# Altium PCB Arduino UNO R3 shield - small.pcbdoc
Units mm, origin at the board's own origin, x right, y up, seen from the top; angles counter-clockwise.
Board outline 57.12 x 53.38 mm, 2 copper layers (Top Layer, Bottom Layer); 34 components, 32 nets, 107 pads, 91 vias.
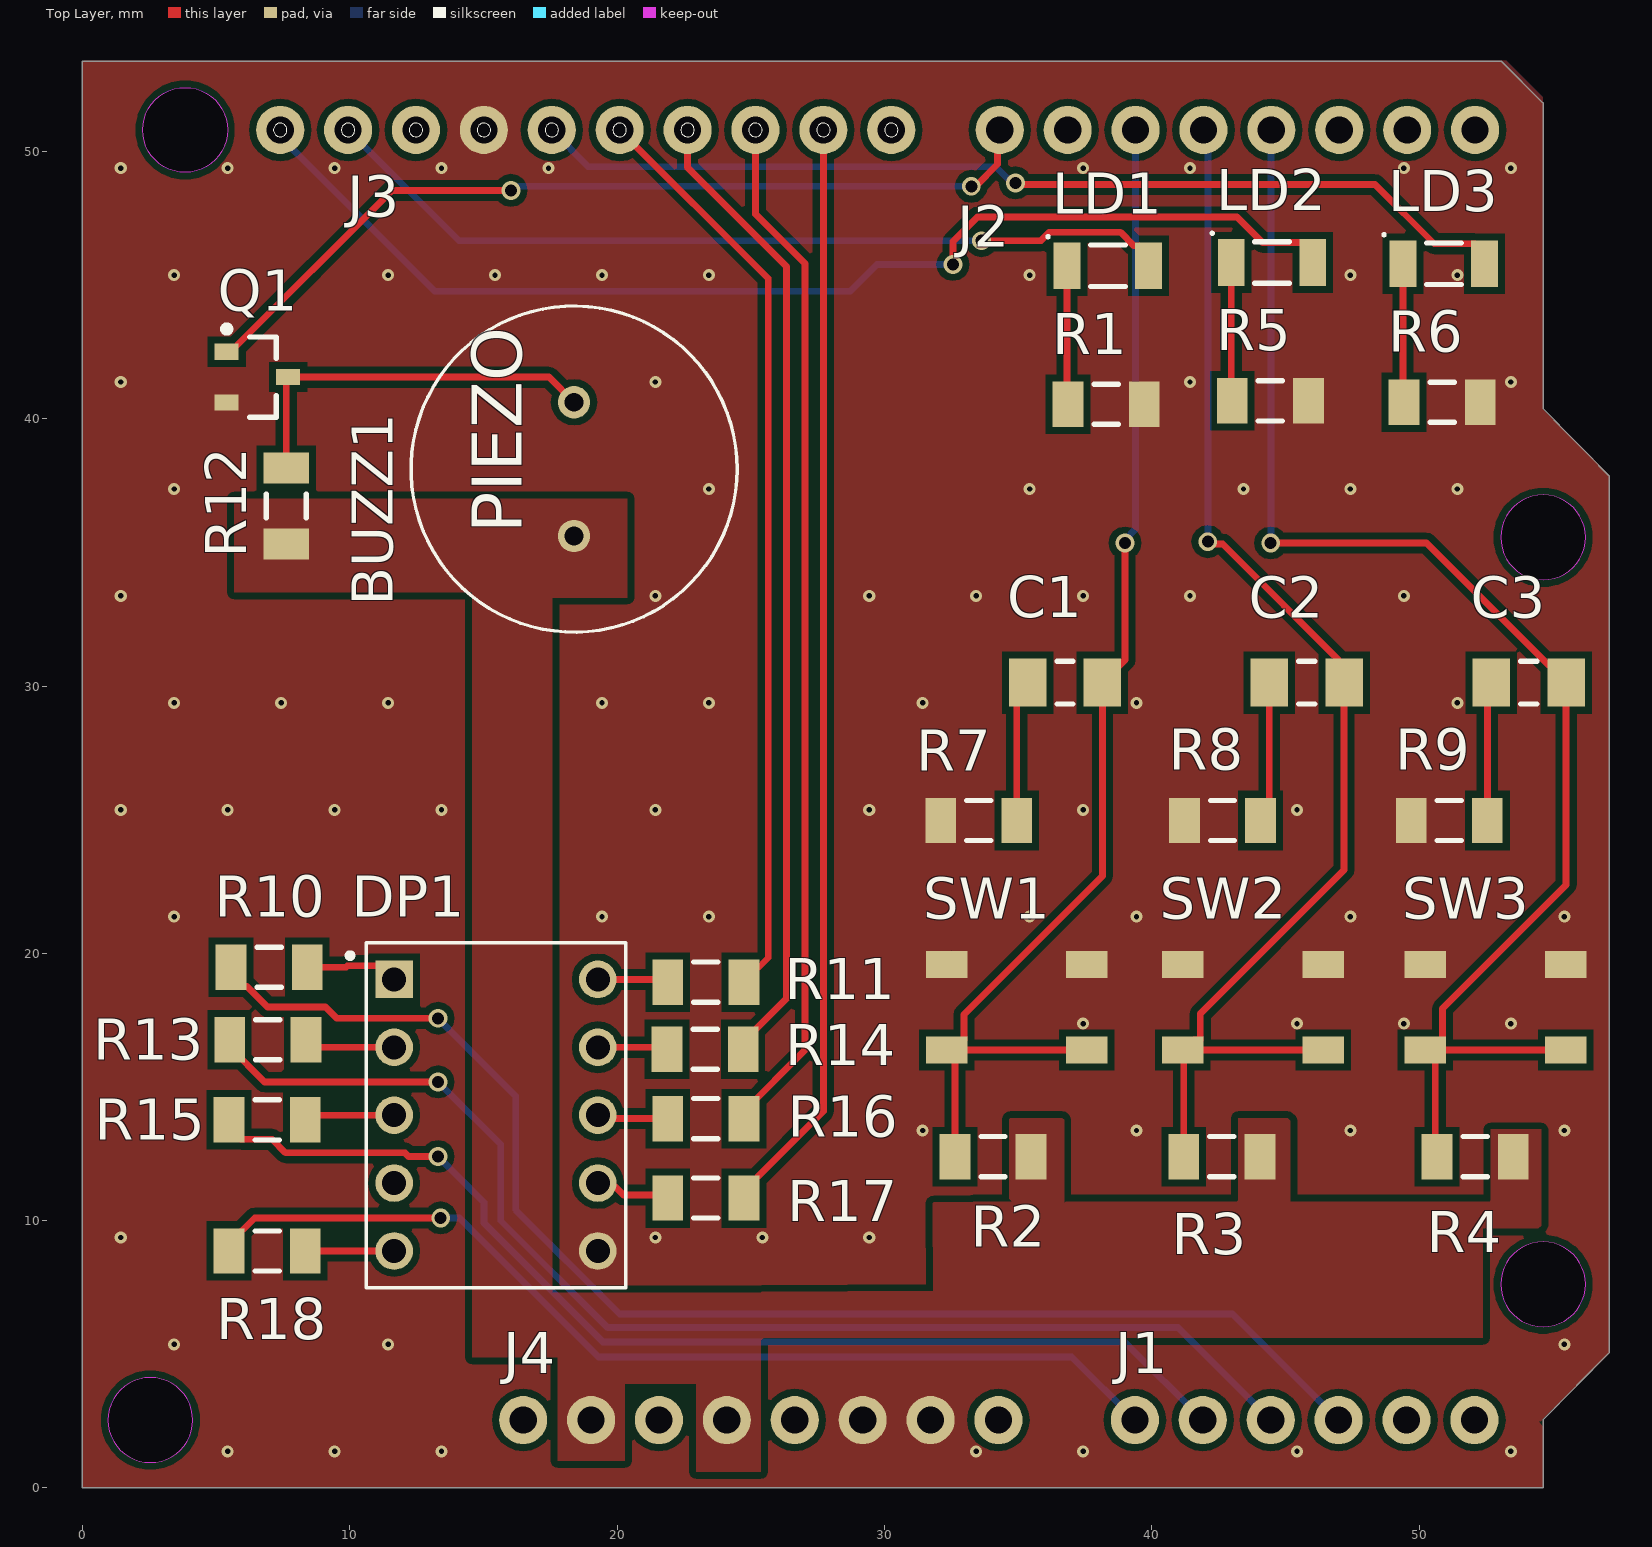
[diagram p0: Top Layer view]
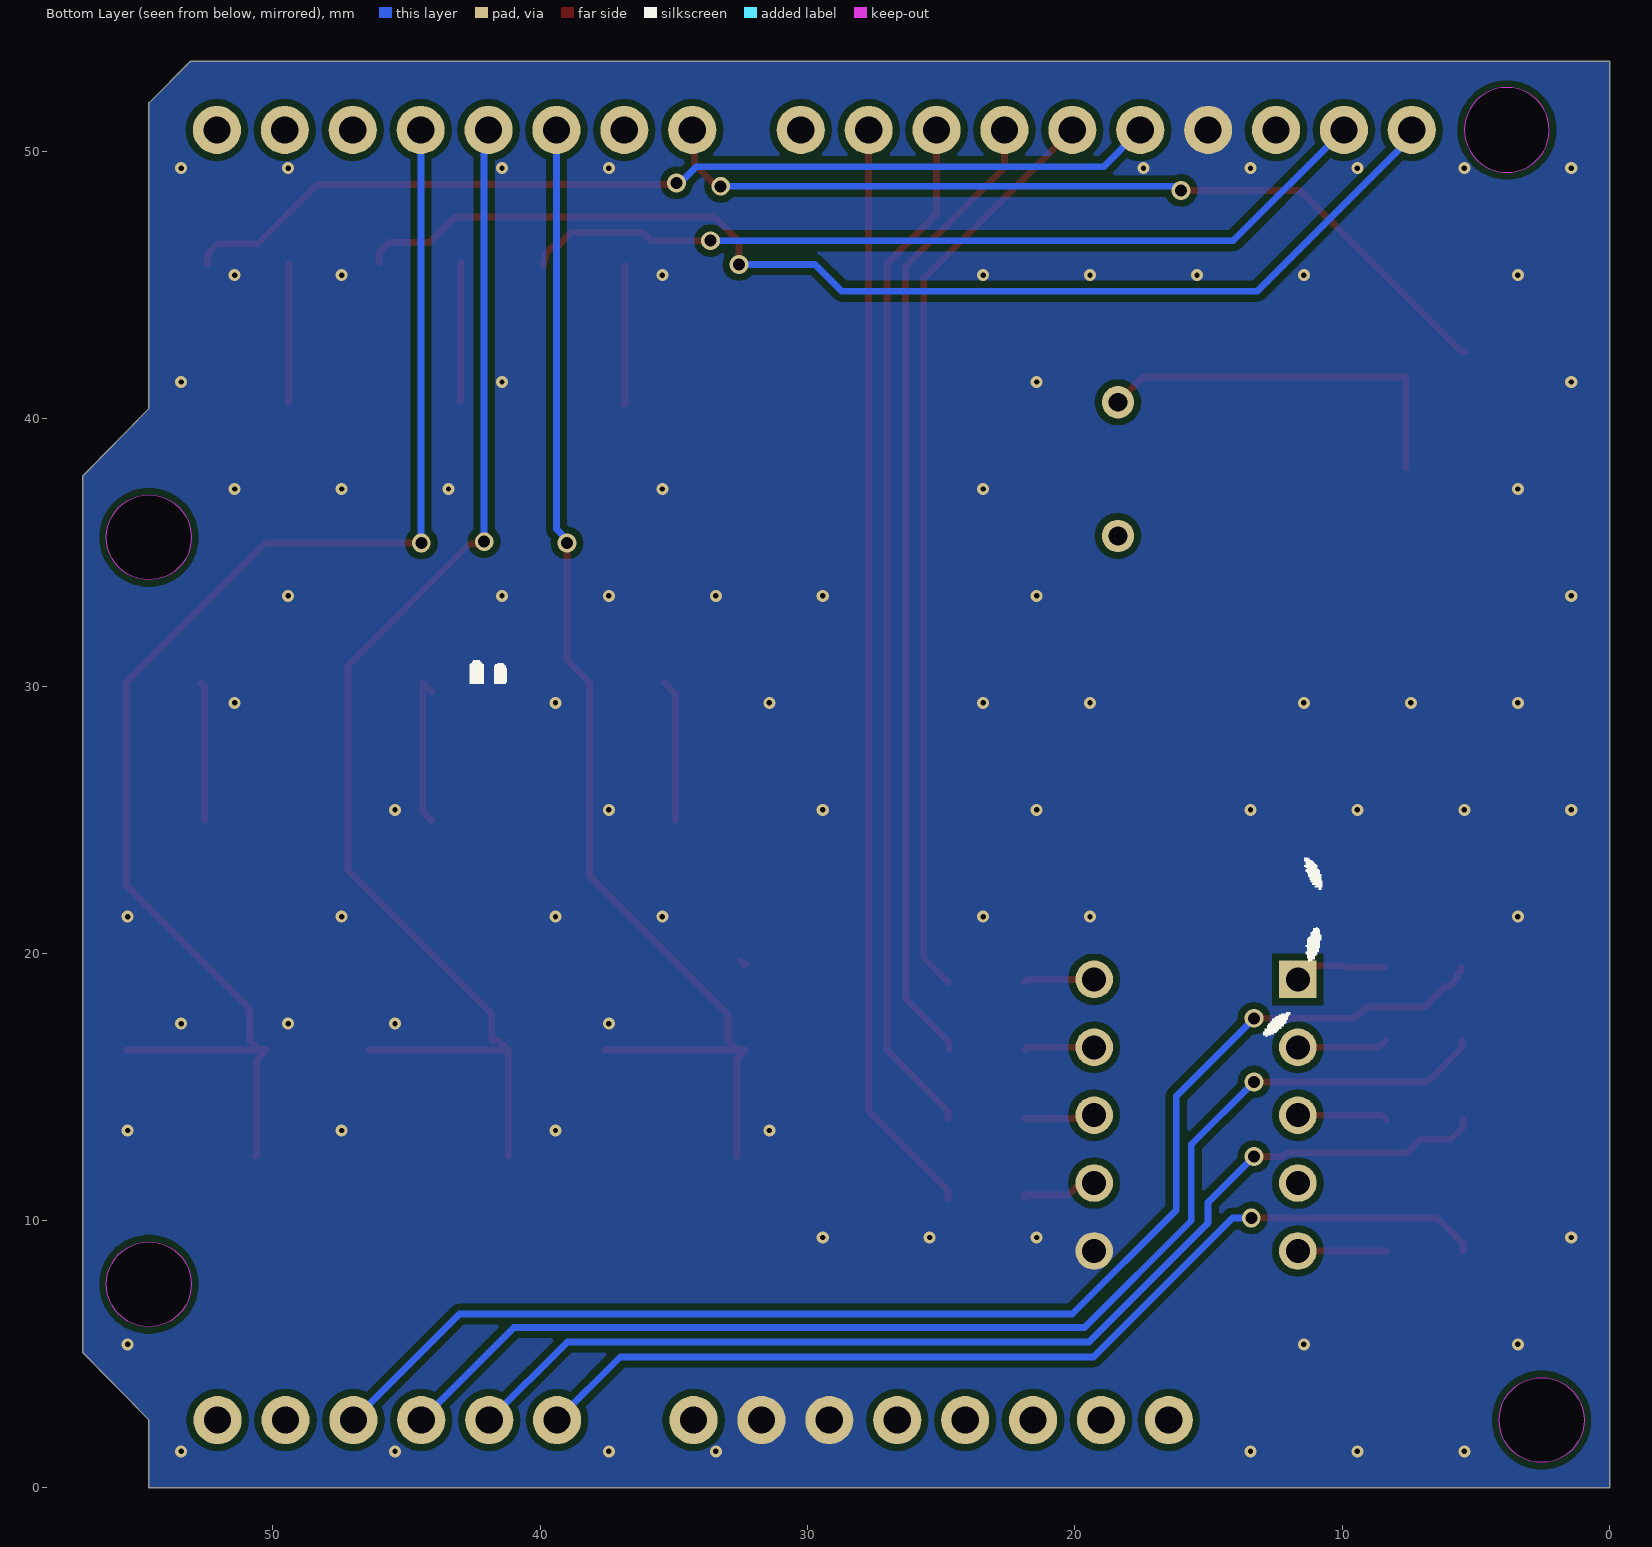
[diagram p1: Bottom Layer view, seen from below]
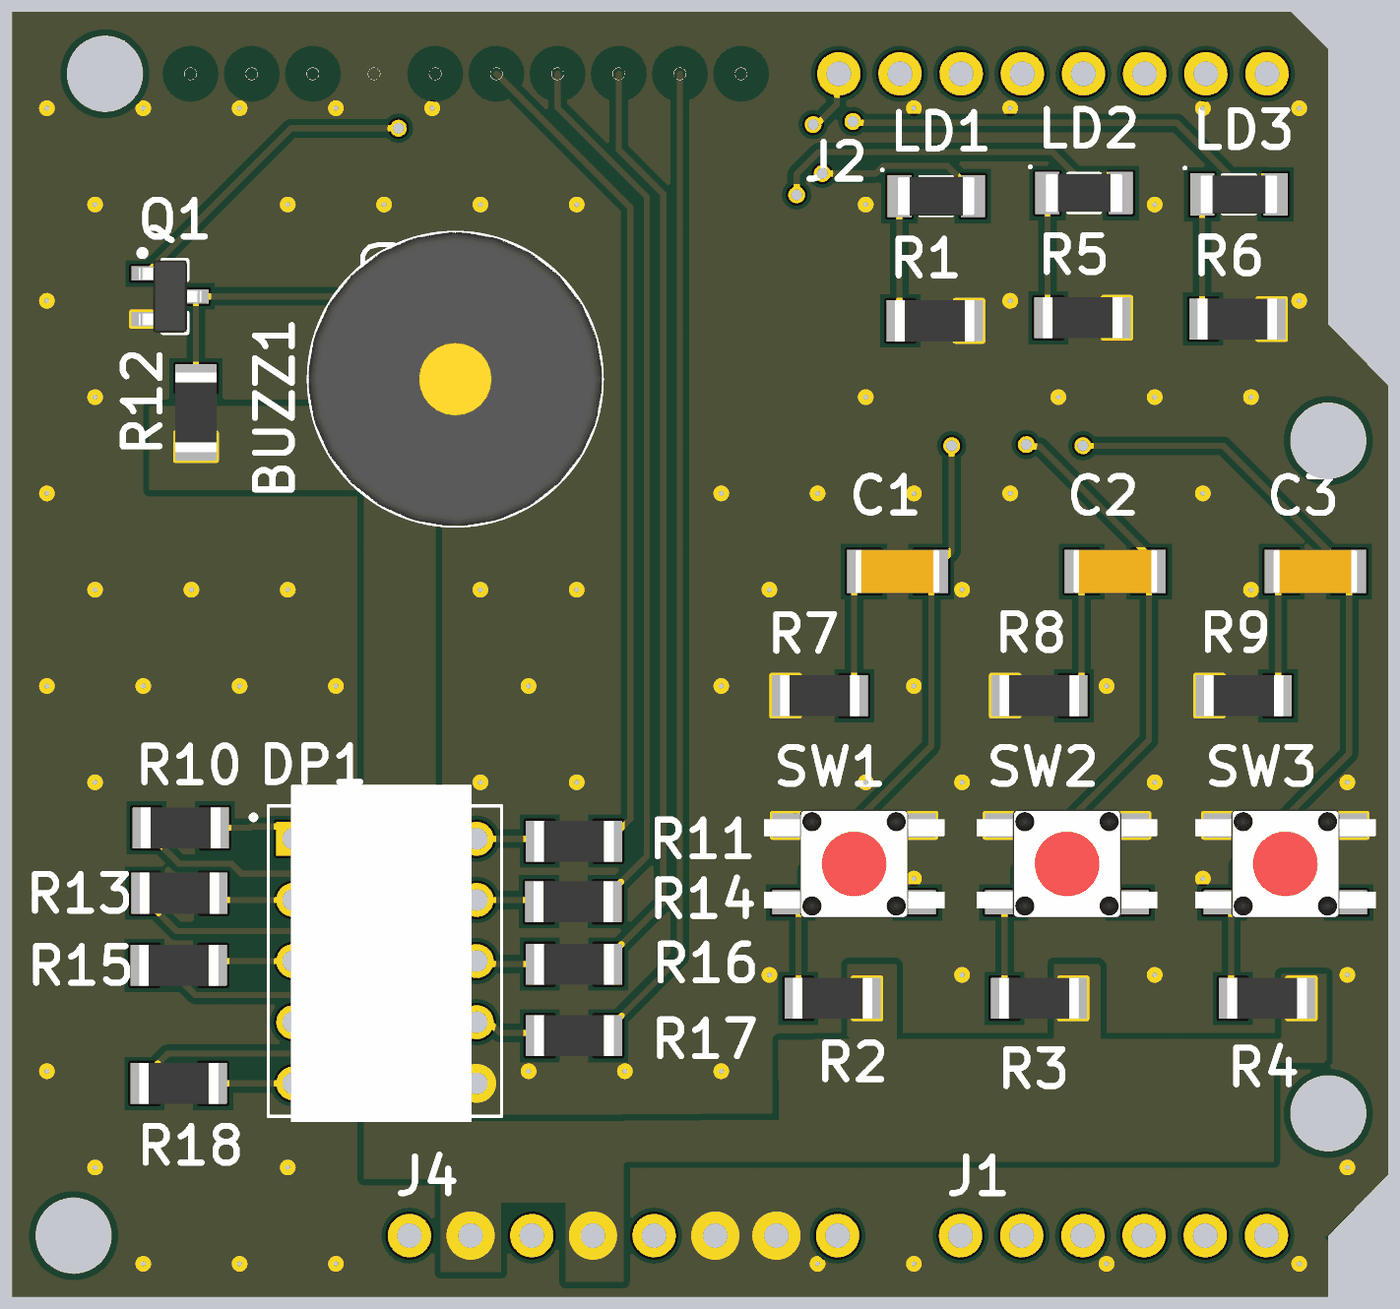
[diagram p2: 3D render of the assembled board from above, using the file's embedded part models]

## Layer stack, top to bottom
Top Solder: solder mask 0.0102, Solder Resist, Dk 3.2
Top Layer: signal copper 0.0356
Dielectric1: dielectric 0.32, FR-4, Dk 4.8
Bottom Layer: signal copper 0.0356
Bottom Solder: solder mask 0.0102, Solder Resist, Dk 3.2

## Board outline
0,0 0,53.378 53.075,53.378 54.64,51.814 54.64,40.386 57.12,37.846 57.12,5.08 54.64,2.54 54.64,0
cut-out: 0.953,2.54 ccw(c2.54,2.54) 2.54,0.953 ccw(c2.54,2.54) 4.127,2.54 ccw(c2.54,2.54) 2.54,4.127 ccw(c2.54,2.54)
cut-out: 53.052,7.62 ccw(c54.64,7.62) 54.64,6.032 ccw(c54.64,7.62) 56.227,7.62 ccw(c54.64,7.62) 54.64,9.207 ccw(c54.64,7.62)
cut-out: 53.052,35.56 ccw(c54.64,35.56) 54.64,33.972 ccw(c54.64,35.56) 56.227,35.56 ccw(c54.64,35.56) 54.64,37.148 ccw(c54.64,35.56)
cut-out: 3.84,49.212 cw(c3.84,50.8) 2.252,50.8 cw(c3.84,50.8) 3.84,52.387 cw(c3.84,50.8) 5.427,50.8 cw(c3.84,50.8)

## Design rules (kind name [scope] priority, off if disabled: settings)
Clearance [All] p1: gap=0.254 ignorepadtopadclearanceinfootprint=FALSE except(0: Arc-Hole Track-Hole SMDPad-Hole THPad-Hole Via-Hole Fill-Hole Poly-Hole Region-Hole Text-Hole)
FabricationTestPointUsage TestPointUsage [All] p1: valid=0 allowmultiple=FALSE
FabricationTestpoint Testpoint [All] p1: side=3 testpointundercomponent=TRUE minsize=1.016 maxsize=2.54 preferedsize=1.524 minholesize=0 maxholesize=1.016 preferedholesize=0.813 testpointgrid=0.025 allowsidetop=TRUE allowsidebottom=TRUE usegrid=TRUE gridtolerance=0
PolygonConnect [All] p1: connectstyle=Direct reliefconductorwidth=0.254 reliefentries=4 polygonreliefangle="90 Angle" airgapwidth=0.254
RoutingVias [All] p1: holewidth=0.711 width=1.27 viastyle="Through Hole" minholewidth=0.2 minwidth=0.45 maxholewidth=0.711 maxwidth=1.27
SilkToSolderMaskClearance SilkscreenOverComponentPads [IsPad] p1: minsilkscreentomaskgap=0.254 clearancetoexposedcopper=TRUE
SolderMaskExpansion [All] p1: expansion=0.102
Width [All] p1: maxlimit=0.254 minlimit=0.127 preferedwidth=0.254
27 further rules are at their usual default settings.

## Components (designator, comment, footprint, x,y, rotation, side; value= is the part's Value field where it differs from the comment)
BUZZ1 "BUZZER" Buzzer 18.39,38.115 r90 top
C1 "100nF" CAPC3216X12N 36.754,30.124 r0 top
C2 "100nF" CAPC3216X12N 45.796,30.124 r0 top
C3 "100nF" CAPC3216X12N 54.102,30.124 r0 top
DP1 "7-SEG" 7-SEG-DISPLAY 15.469,13.945 r0 top
J1 "8-POS-ARDUINO" "PIN 6" 39.37,2.54 r0 top
J2 "8-POS-ARDUINO" "PIN 8" 52.07,50.8 r180 top
J3 "10-POS-ARDUINO" "PIN 10" -61.334,50.8 r180 top
J4 "8-POS-ARDUINO" "PIN 8" 16.51,2.54 r0 top
LD1 "RED" DIOC3216X21N 38.357,45.72 r180 top
LD2 "GREEN" DIOC3216X21N 44.501,45.847 r180 top
LD3 "AMBER" DIOC3216X21N 50.927,45.796 r180 top
Q1 "MMBT3904,215" SOT95P230X110-3N 6.545,41.554 r0 top
R1 "240" RESC3115X06N 38.295,40.538 r0 top
R2 "4K7" RESC3115X06N 34.061,12.395 r0 top
R3 "4K7" RESC3115X06N 42.621,12.395 r0 top
R4 "4K7" RESC3115X06N 52.095,12.395 r0 top
R5 "240" RESC3115X06N 44.439,40.665 r0 top
R6 "240" RESC3115X06N 50.865,40.615 r0 top
R7 "100" RESC3115X06N 33.528,24.968 r0 top
R8 "100" RESC3115X06N 42.647,24.968 r0 top
R9 "100" RESC3115X06N 51.13,24.968 r0 top
R10 "100" RESC3115X06N 6.985,19.482 r180 top
R11 "100" RESC3115X06N 23.317,18.923 r180 top
R12 "1K" RESC3115X06N 7.62,36.733 r270 top
R13 "100" RESC3115X06N 6.934,16.764 r180 top
R14 "100" RESC3115X06N 23.292,16.408 r180 top
R15 "100" RESC3115X06N 6.909,13.767 r180 top
R16 "100" RESC3115X06N 23.317,13.818 r180 top
R17 "100" RESC3115X06N 23.317,10.846 r180 top
R18 "100" RESC3115X06N 6.909,8.865 r180 top
SW1 "BTN" BUTTON 34.95,17.983 r0 top
SW2 "BTN" BUTTON 43.79,17.983 r0 top
SW3 "BTN" BUTTON 52.857,17.983 r0 top

## Footprints (in the part's own frame and the unit in brackets; to place one, negate y for a bottom-side part, rotate by r counter-clockwise, add the part's x,y. Pads: shape width x height; smd on the part's side, far side on the other; paste and mask are expansions set on the pad)
7-SEG-DISPLAY [mm]
  rect 1.408x1.408 hole 0.9: 1(-3.81,5.08)
  round 1.408 hole 0.9: 2(-3.81,2.54) 3(-3.81,0) 4(-3.81,-2.54) 5(-3.81,-5.08) 6(3.81,-5.08) 7(3.81,-2.54) 8(3.81,0) 9(3.81,2.54) 10(3.81,5.08)
  silkscreen extent -5.56,-6.45 4.85,6.45, body extent -3.9,-6.68 3.6,7.33, height 8.5
BUTTON [mm]
  rect 1.55x1 smd: 1(-2.625,1.6) 2(2.625,1.6) 3(-2.625,-1.6) 4(2.625,-1.6)
  body extent -3.75,-2.25 3.75,2.25, height 3.8
Buzzer [mm]
  round 1.208 hole 0.7: 1(-2.5,0) 2(2.5,0)
  silkscreen extent -6.1,-6.1 6.1,6.1, body extent -6.1,-6.1 6.1,6.1, height 6
CAPC3216X12N [mm] "Chip Capacitor, 2-Leads, Body 3,20x1,60mm, IPC Medium Density"
  rect 1.4x1.8 smd: 1(-1.4,0) 2(1.4,0)
  silkscreen extent -0.3,-0.8 0.3,0.8, body extent -1.75,-0.9 1.75,0.9, height 1.2
DIOC3216X21N [mm] "Chip Diode, 2-Leads, Body 3,20x1,60mm, IPC Medium Density"
  rect 1x1.75 smd: 1(-1.525,0) 2(1.525,0)
  silkscreen extent -0.65,-1.14 2.29,0.77, body extent -1.6,-0.8 1.6,0.8, height 2.06
"PIN 6" [mm]
  round 1.8 hole 1.02: 1(0,0) 2(2.54,0) 3(5.08,0) 4(7.62,0) 5(10.16,0) 6(12.7,0)
"PIN 8" [mm]
  round 1.8 hole 1.02: 1(-0.025,0) 2(2.515,0) 3(5.055,0) 4(7.595,0) 5(10.135,0) 6(12.675,0) 7(15.215,0) 8(17.755,0)
"PIN 10" [mm]
  round 1.8 hole 1.02: 1(-91.59,0) 2(-89.05,0) 3(-86.51,0) 4(-83.97,0) 5(-81.43,0) 6(-78.89,0) 7(-76.35,0) 8(-73.81,0) 9(-71.27,0) 10(-68.73,0)
RESC3115X06N [mm] "Chip Resistor, 2-Leads, Body 3,10x1,50mm, IPC Medium Density"
  rect 1.15x1.7 smd: 1(-1.425,0) 2(1.425,0)
  silkscreen extent -0.45,-0.75 0.45,0.75, body extent -1.65,-0.85 1.65,0.85, height 0.6
SOT95P230X110-3N [mm] "SOT23, 3-Leads, Body 2,90x2,30mm, Pitch 0,95mm, IPC Medium Density"
  rect 0.9x0.6 smd: 1(-1.15,0.95) 2(-1.15,-0.95) 3(1.15,0)
  silkscreen extent -1.27,-1.5 0.7,1.92, body extent -1.3,-1.5 1.3,1.5, height 1.1

## Part data
BUZZ1: library part PS1240P02BT, "AUDIO PIEZO TRANSDUCER 30V TH", Frequency=4kHz, Manufacturer=TDK, Max Operating Temperature=70°C, Min Operating Temperature=-10°C, Operating Supply Voltage=3V, Package Quantity=1, Supplier Part Number 1=445-2525-1-ND, ComponentLink1Description=https://datasheet.ciiva.com/0/ef532-ps-112.pdf?src-supplier=Digi-Key, ComponentLink1URL=https://datasheet.ciiva.com/0/ef532-ps-112.pdf?src-supplier=Digi-Key, ComponentLink2Description=https://datasheet.ciiva.com/16225/ef532-ps-16225062.pdf?src-supplier=Onlinecomponents.com, ComponentLink2URL=https://datasheet.ciiva.com/16225/ef532-ps-16225062.pdf?src-supplier=Onlinecomponents.com, ComponentLink3Description=https://datasheet.ciiva.com/3306/ef532-ps-3306958.pdf?src-supplier=Avnet, ComponentLink3URL=https://datasheet.ciiva.com/3306/ef532-ps-3306958.pdf?src-supplier=Avnet, ComponentLink4Description=https://datasheet.ciiva.com/0/ef532-ps-111.pdf?src-supplier=Digi-Key, ComponentLink4URL=https://datasheet.ciiva.com/0/ef532-ps-111.pdf?src-supplier=Digi-Key, Diameter=12.2mm, Height=6.5mm, Lead Free="Lead Free", Manufacturer Part Number=PS1240P02BT, Mount="Through Hole", Number of Terminals=2, Packaging="Tape and Reel", Pricing 1="1 = 0,68000, 10 = 0,57800, 25 = 0,54040, 50 = 0,51240, 100 = 0,48530 (USD)", RoHS=Yes, Stock 1=21154, Supplier 1=Digi-Key, Termination="PC Pins", Voltage Rating (DC)=3V, Washable=No
C1 C2 C3: library part CC1206KRX7R9BB104, "CAP CER 0.1UF 50V X7R 1206", Case/Package=1206, Case Code (Metric)=3216, Dielectric=X7R, Insulation Resistance=100GR, Manufacturer=Yageo, Max Operating Temperature=125°C, Min Operating Temperature=-55°C, Package Quantity=1, Supplier Part Number 1=311-1179-1-ND, Tolerance=10%, Voltage=50V, Capacitance=100nF, Case Code (Imperial)=1206, ComponentLink1Description=https://datasheet.ciiva.com/11786/0900766b80d84f1d-11786968.pdf?src-supplier=RSComponents, ComponentLink1URL=https://datasheet.ciiva.com/11786/0900766b80d84f1d-11786968.pdf?src-supplier=RSComponents, ComponentLink2Description=https://datasheet.ciiva.com/7978/1489800-7978230.pdf?src-supplier=Element14, ComponentLink2URL=https://datasheet.ciiva.com/7978/1489800-7978230.pdf?src-supplier=Element14, ComponentLink3Description=https://datasheet.ciiva.com/16625/upy-gphc-x7r-6-3v-to-50v-8-16625558.pdf?src-supplier=Avnet+Europe, ComponentLink3URL=https://datasheet.ciiva.com/16625/upy-gphc-x7r-6-3v-to-50v-8-16625558.pdf?src-supplier=Avnet+Europe, ComponentLink4Description=https://datasheet.ciiva.com/46385/1734573-46385063.pdf?src-supplier=Element14, ComponentLink4URL=https://datasheet.ciiva.com/46385/1734573-46385063.pdf?src-supplier=Element14, ComponentLink5Description=https://datasheet.ciiva.com/28363/1734573-28363672.pdf?src-supplier=Element14, ComponentLink5URL=https://datasheet.ciiva.com/28363/1734573-28363672.pdf?src-supplier=Element14, ComponentLink6Description=https://datasheet.ciiva.com/144/mlccorderingcode-144905.pdf?src-supplier=Digi-Key, ComponentLink6URL=https://datasheet.ciiva.com/144/mlccorderingcode-144905.pdf?src-supplier=Digi-Key, ComponentLink7Description=https://datasheet.ciiva.com/5425/upy-gp-np0-16v-to-50v-8-3714-5425561.pdf?src-supplier=Mouser, ComponentLink7URL=https://datasheet.ciiva.com/5425/upy-gp-np0-16v-to-50v-8-3714-5425561.pdf?src-supplier=Mouser, ComponentLink8Description=https://datasheet.ciiva.com/144/mlccorderingcode-144906.pdf?src-supplier=Digi-Key, ComponentLink8URL=https://datasheet.ciiva.com/144/mlccorderingcode-144906.pdf?src-supplier=Digi-Key, ComponentLink9Description=https://datasheet.ciiva.com/144/mlccorderingcode-144907.pdf?src-supplier=Digi-Key, ComponentLink9URL=https://datasheet.ciiva.com/144/mlccorderingcode-144907.pdf?src-supplier=Digi-Key, ComponentLink10Description=https://datasheet.ciiva.com/15189/getdatasheetpartid-251811-15189275.pdf?src-supplier=Verical, ComponentLink10URL=https://datasheet.ciiva.com/15189/getdatasheetpartid-251811-15189275.pdf?src-supplier=Verical, ComponentLink11Description=https://datasheet.ciiva.com/28450/1489800-28450892.pdf?src-supplier=Element14, ComponentLink11URL=https://datasheet.ciiva.com/28450/1489800-28450892.pdf?src-supplier=Element14, Depth=1.6mm, Halogen Free="Halogen Free", Height=0.85mm, Lead Free="Lead Free", Length=3.2mm, Manufacturer Part Number=CC1206KRX7R9BB104, Material=Ceramic, Mount="Surface Mount", Number of Pins=2, Packaging="Tape and Reel", Pricing 1="1 = 0,19000, 10 = 0,13000, 100 = 0,06610, 500 = 0,04520, 1000 = 0,03999 (USD)", Radiation Hardening=No, REACH SVHC=Unknown, RoHS=Yes, Stock 1=5890110, Supplier 1=Digi-Key, Termination=SMD/SMT, Thickness=0.033inch, Voltage Rating=50V, Voltage Rating (DC)=50V, Width=0.063inch
DP1: library part INND-TS40YGCB, Manufacturer=Inolux, Supplier Part Number 1=1830-1154-ND, Manufacturer Part Number=INND-TS40YGCB, Pricing 1="1 = 1,10000, 10 = 0,89500, 100 = 0,55080, 500 = 0,46818, 1000 = 0,38556, 2500 = 0,36628, 5000 = 0,35802, 10000 = 0,34976, 25000 = 0,34425 (USD)", RoHS=No, Stock 1=5781, Supplier 1=Digi-Key
J1: library part PREC006SABN-RC, "Conn Header Vert 6POS 2.54MM", Color=Black, Manufacturer=Sullins, Package Quantity=1, Supplier Part Number 1=S1022EC-06-ND, ComponentLink1Description=https://datasheet.ciiva.com/741/xrxczzzsxxn-rc-st-11635-b-741039.pdf?src-supplier=Digi-Key, ComponentLink1URL=https://datasheet.ciiva.com/741/xrxczzzsxxn-rc-st-11635-b-741039.pdf?src-supplier=Digi-Key, Connector Type="Male Pin", Contact Mating Length=0.23inch, Contact Plating=Tin, Manufacturer Part Number=PREC006SABN-RC, Mount="Through Hole", Number of Positions=6, Number of Rows=1, Packaging=Bulk, Pitch=0.1inch, Pricing 1="1 = 0,16000, 10 = 0,15100, 25 = 0,12920, 50 = 0,11280, 100 = 0,10480, 250 = 0,09272, 500 = 0,08870 (USD)", RoHS=Yes, Stock 1=1610, Supplier 1=Digi-Key, Termination=Solder
J2: library part PREC008SAAN-RC, "CONN HEADER VERT 8POS 2.54MM", Color=Black, Manufacturer=Sullins, Package Quantity=1, Supplier Part Number 1=S1012EC-08-ND, ComponentLink1Description=https://datasheet.ciiva.com/740/zrzczzzszzn-rc-st-11635-b-740837.pdf?src-supplier=Digi-Key, ComponentLink1URL=https://datasheet.ciiva.com/740/zrzczzzszzn-rc-st-11635-b-740837.pdf?src-supplier=Digi-Key, Connector Type="Male Pin", Contact Mating Length=0.23inch, Contact Plating=Tin, Manufacturer Part Number=PREC008SAAN-RC, Mount="Through Hole", Number of Positions=8, Number of Rows=1, Packaging=Bulk, Pitch=0.1inch, Pricing 1="1 = 0,19000, 10 = 0,17800, 25 = 0,15200, 50 = 0,13300, 100 = 0,12360, 250 = 0,10928, 500 = 0,10454 (USD)", RoHS=Yes, Stock 1=3323, Supplier 1=Digi-Key, Termination=Solder
J3: library part PREC010SAAN-RC, "CONN HEADER .100\" SNGL STR 10POS", Color=Black, Manufacturer=Sullins, Package Quantity=1, Supplier Part Number 1=S1012EC-10-ND, ComponentLink1Description=https://datasheet.ciiva.com/740/zrzczzzszzn-rc-st-11635-b-740835.pdf?src-supplier=Digi-Key, ComponentLink1URL=https://datasheet.ciiva.com/740/zrzczzzszzn-rc-st-11635-b-740835.pdf?src-supplier=Digi-Key, Connector Type="Male Pin", Contact Mating Length=0.23inch, Contact Plating=Tin, Manufacturer Part Number=PREC010SAAN-RC, Mount="Through Hole", Number of Positions=10, Number of Rows=1, Packaging=Bulk, Pitch=0.1inch, Pricing 1="1 = 0,24000, 10 = 0,22300, 25 = 0,19000, 50 = 0,16640, 100 = 0,15440, 250 = 0,13664, 500 = 0,13068 (USD)", RoHS=Yes, Stock 1=2330, Supplier 1=Digi-Key, Termination=Solder
J4: library part "PREC008SAAN-RC (2)", "CONN HEADER VERT 8POS 2.54MM", Color=Black, Manufacturer=Sullins, Manufacturer Part Number=PREC008SAAN-RC, Package Quantity=1, Supplier Part Number 1=S1012EC-08-ND, ComponentLink1Description=https://datasheet.ciiva.com/740/zrzczzzszzn-rc-st-11635-b-740837.pdf?src-supplier=Digi-Key, ComponentLink1URL=https://datasheet.ciiva.com/740/zrzczzzszzn-rc-st-11635-b-740837.pdf?src-supplier=Digi-Key, Connector Type="Male Pin", Contact Mating Length=0.23inch, Contact Plating=Tin, Mount="Through Hole", Number of Positions=8, Number of Rows=1, Packaging=Bulk, Pitch=0.1inch, Pricing 1="1 = 0,19000, 10 = 0,17800, 25 = 0,15200, 50 = 0,13300, 100 = 0,12360, 250 = 0,10928, 500 = 0,10454 (USD)", RoHS=Yes, Stock 1=3323, Supplier 1=Digi-Key, Termination=Solder
LD1: library part LTST-C150CKT, "LED Uni-Color Red 660nm 2-Pin Chip LED T/R", Case/Package=1206, Case Code (Metric)=3216, Color=Red, Forward Current=40mA, Forward Voltage=1.8V, Lens Color=Colorless, Manufacturer="Vishay Lite-On", Max Operating Temperature=85°C, Max Power Dissipation=100mW, Min Operating Temperature=-55°C, Package Quantity=1, Reverse Voltage=5V, Supplier Part Number 1=160-1167-1-ND, Test Current=10mA, Case Code (Imperial)=1206, ComponentLink1Description=https://datasheet.ciiva.com/2110/ltst-c150ckt-2110225.pdf?src-supplier=Digi-Key, ComponentLink1URL=https://datasheet.ciiva.com/2110/ltst-c150ckt-2110225.pdf?src-supplier=Digi-Key, ComponentLink2Description=https://datasheet.ciiva.com/16222/lite-on20ltst-c150ckt-16222610.pdf?src-supplier=Future+Electronics, ComponentLink2URL=https://datasheet.ciiva.com/16222/lite-on20ltst-c150ckt-16222610.pdf?src-supplier=Future+Electronics, ComponentLink3Description=https://datasheet.ciiva.com/11775/0900766b80dc025c-11775635.pdf?src-supplier=RSComponents, ComponentLink3URL=https://datasheet.ciiva.com/11775/0900766b80dc025c-11775635.pdf?src-supplier=RSComponents, ComponentLink4Description=https://datasheet.ciiva.com/15117/getdatasheetpartid-103928-15117444.pdf?src-supplier=Verical, ComponentLink4URL=https://datasheet.ciiva.com/15117/getdatasheetpartid-103928-15117444.pdf?src-supplier=Verical, ComponentLink5Description=https://datasheet.ciiva.com/19465/697733-19465844.pdf?src-supplier=Jameco, ComponentLink5URL=https://datasheet.ciiva.com/19465/697733-19465844.pdf?src-supplier=Jameco, ComponentLink6Description=https://datasheet.ciiva.com/2110/s-110-ltst-c150ckt-2110226.pdf?src-supplier=Digi-Key, ComponentLink6URL=https://datasheet.ciiva.com/2110/s-110-ltst-c150ckt-2110226.pdf?src-supplier=Digi-Key, ComponentLink7Description=https://datasheet.ciiva.com/2110/s-110-ltst-c150ckt-2110227.pdf?src-supplier=Digi-Key, ComponentLink7URL=https://datasheet.ciiva.com/2110/s-110-ltst-c150ckt-2110227.pdf?src-supplier=Digi-Key, Depth=1.6mm, Dominant Wavelength=638nm, Height=1.1mm, Illumination Color=Red, Lead Free="Lead Free", Length=3.2mm, Lens Style=Diffused, Lens Transparency=Clear, Luminous Intensity=25mcd, Manufacturer Part Number=LTST-C150CKT, Mount="Surface Mount", Number of Elements=1, Number of LEDs=1, Number of Pins=2, Packaging="Tape and Reel", Power Dissipation=100mW, Power Rating=100mW, Pricing 1="1 = 0,35000, 10 = 0,25700, 100 = 0,12190, 500 = 0,08128, 1000 = 0,06366 (USD)", Radiation Hardening=No, RoHS=Yes, Stock 1=244566, Supplier 1=Digi-Key, Viewing Angle=130°, Wavelength=660nm, Width=1.6mm
LD2: library part LTST-C150GKT, "LED GREEN CLEAR 1206 SMD", Case/Package=1206, Case Code (Metric)=3216, Color=Green, Forward Current=30mA, Forward Voltage=2.1V, Lens Color=Colorless, Manufacturer="Vishay Lite-On", Max Operating Temperature=85°C, Max Power Dissipation=100mW, Min Operating Temperature=-55°C, Package Quantity=1, Reverse Voltage=5V, Supplier Part Number 1=160-1169-1-ND, Test Current=10mA, Case Code (Imperial)=1206, ComponentLink1Description=https://datasheet.ciiva.com/2110/ltst-c150gkt-2110032.pdf?src-supplier=Digi-Key, ComponentLink1URL=https://datasheet.ciiva.com/2110/ltst-c150gkt-2110032.pdf?src-supplier=Digi-Key, ComponentLink2Description=https://datasheet.ciiva.com/12400/lite-on-ltst-c150gkt-187412-12400912.pdf?src-supplier=Mouser, ComponentLink2URL=https://datasheet.ciiva.com/12400/lite-on-ltst-c150gkt-187412-12400912.pdf?src-supplier=Mouser, ComponentLink3Description=https://datasheet.ciiva.com/11775/0900766b80dc0263-11775637.pdf?src-supplier=RSComponents, ComponentLink3URL=https://datasheet.ciiva.com/11775/0900766b80dc0263-11775637.pdf?src-supplier=RSComponents, ComponentLink4Description=https://datasheet.ciiva.com/4266/s-110-ltst-c150gkt-4266310.pdf?src-supplier=Arrow, ComponentLink4URL=https://datasheet.ciiva.com/4266/s-110-ltst-c150gkt-4266310.pdf?src-supplier=Arrow, ComponentLink5Description=https://datasheet.ciiva.com/16375/ltst-c150gkt-16375926.pdf?src-supplier=Future+Electronics, ComponentLink5URL=https://datasheet.ciiva.com/16375/ltst-c150gkt-16375926.pdf?src-supplier=Future+Electronics, ComponentLink6Description=https://datasheet.ciiva.com/15117/getdatasheetpartid-142080-15117739.pdf?src-supplier=Verical, ComponentLink6URL=https://datasheet.ciiva.com/15117/getdatasheetpartid-142080-15117739.pdf?src-supplier=Verical, Depth=1.6mm, Dominant Wavelength=569nm, Height=1.1mm, Illumination Color=Green, Lead Free="Lead Free", Length=3.2mm, Lens Style=Diffused, Lens Transparency=Clear, Luminous Intensity=6mcd, Manufacturer Part Number=LTST-C150GKT, Mount="Surface Mount", Number of Elements=1, Number of LEDs=1, Number of Pins=2, Packaging="Tape and Reel", Power Dissipation=100mW, Power Rating=100mW, Pricing 1="1 = 0,33000, 10 = 0,24000, 100 = 0,11390, 500 = 0,07594, 1000 = 0,05948 (USD)", Radiation Hardening=No, RoHS=Yes, Stock 1=429365, Supplier 1=Digi-Key, Viewing Angle=130°, Wavelength=565nm, Width=1.6mm
LD3: library part LTST-C150AKT, "LED AMBER CLEAR 1206 SMD", Case/Package=1206, Case Code (Metric)=3216, Color=Orange, Forward Current=30mA, Forward Voltage=2.1V, Lens Color=Colorless, Manufacturer="Vishay Lite-On", Max Operating Temperature=85°C, Min Operating Temperature=-55°C, Package Quantity=1, Power Dissipation=100mW, Reverse Voltage=5V, Supplier Part Number 1=160-1166-1-ND, Test Current=10mA, Case Code (Imperial)=1206, ComponentLink1Description=https://datasheet.ciiva.com/2110/ltst-c150akt-2110240.pdf?src-supplier=Digi-Key, ComponentLink1URL=https://datasheet.ciiva.com/2110/ltst-c150akt-2110240.pdf?src-supplier=Digi-Key, ComponentLink2Description=https://datasheet.ciiva.com/15117/getdatasheetpartid-147499-15117854.pdf?src-supplier=Verical, ComponentLink2URL=https://datasheet.ciiva.com/15117/getdatasheetpartid-147499-15117854.pdf?src-supplier=Verical, ComponentLink3Description=https://datasheet.ciiva.com/11774/0900766b80dc025b-11774743.pdf?src-supplier=RSComponents, ComponentLink3URL=https://datasheet.ciiva.com/11774/0900766b80dc025b-11774743.pdf?src-supplier=RSComponents, ComponentLink4Description=https://datasheet.ciiva.com/2110/ltst-c150akt-2110241.pdf?src-supplier=Digi-Key, ComponentLink4URL=https://datasheet.ciiva.com/2110/ltst-c150akt-2110241.pdf?src-supplier=Digi-Key, ComponentLink5Description=https://datasheet.ciiva.com/2110/ltst-c150akt-2110242.pdf?src-supplier=Digi-Key, ComponentLink5URL=https://datasheet.ciiva.com/2110/ltst-c150akt-2110242.pdf?src-supplier=Digi-Key, ComponentLink6Description=https://datasheet.ciiva.com/16448/ltst-c150akt-16448581.pdf?src-supplier=Future+Electronics, ComponentLink6URL=https://datasheet.ciiva.com/16448/ltst-c150akt-16448581.pdf?src-supplier=Future+Electronics, Depth=1.6mm, Dominant Wavelength=602nm, Height=1.1mm, Illumination Color=Orange, Lead Free="Lead Free", Length=3.2mm, Lens Style=Clear, Lens Transparency=Clear, Luminous Intensity=6mcd, Manufacturer Part Number=LTST-C150AKT, Mount="Surface Mount", Number of Elements=1, Number of LEDs=1, Number of Pins=2, Packaging="Tape and Reel", Power Rating=100mW, Pricing 1="1 = 0,35000, 10 = 0,25700, 100 = 0,12190, 500 = 0,08128, 1000 = 0,06366 (USD)", Radiation Hardening=No, RoHS=Yes, Stock 1=13106, Supplier 1=Digi-Key, Viewing Angle=130°, Wavelength=610nm, Width=1.6mm
Q1: "TRANS NPN 40V 0.2A SOT23", Manufacturer=Nexperia, Supplier Part Number 1=1727-4044-1-ND, ComponentLink1Description=http://www.farnell.com/datasheets/2328888.pdf?src-supplier=Farnell, ComponentLink1URL=http://www.farnell.com/datasheets/2328888.pdf?src-supplier=Farnell, ComponentLink2Description=https://assets.nexperia.com/documents/data-sheet/MMBT3904.pdf?src-supplier=Digi-Key, ComponentLink2URL=https://assets.nexperia.com/documents/data-sheet/MMBT3904.pdf?src-supplier=Digi-Key, ComponentLink3Description=http://www.farnell.com/datasheets/2328888.pdf?src-supplier=Newark, ComponentLink3URL=http://www.farnell.com/datasheets/2328888.pdf?src-supplier=Newark, Manufacturer Part Number=MMBT3904,215, Pricing 1="1 = 0,10000, 10 = 0,09500, 100 = 0,05180, 500 = 0,03188, 1000 = 0,02174 (USD)", RoHS=No, Stock 1=214014, Supplier 1=Digi-Key
R1 R5 R6: library part RMCF1206FT240R, "Res Thick Film 1206 240 Ohm 1% 0.25W(1/4W) ±100ppm/C Molded SMD Automotive T/R", Case/Package=1206, Case Code (Metric)=3216, Manufacturer="Stackpole Electronics", Max Operating Temperature=155°C, Max Power Dissipation=250mW, Min Operating Temperature=-55°C, Resistance=240R, Supplier Part Number 1=RMCF1206FT240RCT-ND, Temperature Coefficient=100ppm/°C, Tolerance=1%, Case Code (Imperial)=1206, ComponentLink1Description=http://components.arrow.com/part/dataview/46929293S8409770N1174?src-supplier=Arrow, ComponentLink1URL=http://components.arrow.com/part/dataview/46929293S8409770N1174?src-supplier=Arrow, ComponentLink2Description=https://www.verical.com/server-webapp/html/getDatasheet?partID=465735&src-supplier=Verical, ComponentLink2URL=https://www.verical.com/server-webapp/html/getDatasheet?partID=465735&src-supplier=Verical, ComponentLink3Description=https://www.seielect.com/Catalog/SEI-RMCF_RMCP.pdf?src-supplier=Digi-Key, ComponentLink3URL=https://www.seielect.com/Catalog/SEI-RMCF_RMCP.pdf?src-supplier=Digi-Key, ComponentLink4Description=https://www.seielect.com/catalog/SEI-Packaging.pdf?src-supplier=Digi-Key, ComponentLink4URL=https://www.seielect.com/catalog/SEI-Packaging.pdf?src-supplier=Digi-Key, ComponentLink5Description=https://www.seielect.com/catalog/SEI-RMCF_RMCP.pdf?src-supplier=Avnet, ComponentLink5URL=https://www.seielect.com/catalog/SEI-RMCF_RMCP.pdf?src-supplier=Avnet, Composition="Thick Film", Contact Plating=Tin, Depth=1.6mm, Features="Automotive AEC-Q200", Height=0.028inch, Length=0.126inch, Manufacturer Part Number=RMCF1206FT240R, Military Standard=Not, Mount="Surface Mount", Number of Terminations=2, Packaging="Tape and Reel", Pricing 1="1 = 0,10000, 10 = 0,03600, 100 = 0,01470, 1000 = 0,00659, 2500 = 0,00572 (USD)", Radiation Hardening=No, RoHS=Yes, Stock 1=2191, Supplier 1=Digi-Key, Width=0.063inch
R2 R3 R4: library part RMCF1206FT4K70, "RES SMD 4.7K OHM 1% 1/4W 1206", Case/Package=1206, Case Code (Metric)=3216, Manufacturer="Stackpole Electronics", Max Operating Temperature=155°C, Max Power Dissipation=250mW, Min Operating Temperature=-55°C, Resistance=4.7kR, Supplier Part Number 1=RMCF1206FT4K70CT-ND, Temperature Coefficient=100ppm/°C, Tolerance=1%, Case Code (Imperial)=1206, ComponentLink1Description=https://www.seielect.com/Catalog/SEI-RMCF_RMCP.pdf?src-supplier=Digi-Key, ComponentLink1URL=https://www.seielect.com/Catalog/SEI-RMCF_RMCP.pdf?src-supplier=Digi-Key, ComponentLink2Description=https://www.verical.com/server-webapp/html/getDatasheet?partID=408276&src-supplier=Verical, ComponentLink2URL=https://www.verical.com/server-webapp/html/getDatasheet?partID=408276&src-supplier=Verical, ComponentLink3Description=http://components.arrow.com/part/dataview/44988237S7495835N1174?src-supplier=Arrow, ComponentLink3URL=http://components.arrow.com/part/dataview/44988237S7495835N1174?src-supplier=Arrow, Composition="Thick Film", Contact Plating=Tin, Depth=1.6mm, Features="Automotive AEC-Q200", Height=0.028inch, Length=0.126inch, Manufacturer Part Number=RMCF1206FT4K70, Military Standard=Not, Mount="Surface Mount", Number of Terminations=2, Packaging="Tape and Reel", Pricing 1="1 = 0,10000, 10 = 0,03600, 100 = 0,01470, 1000 = 0,00659, 2500 = 0,00572 (USD)", Radiation Hardening=No, RoHS=Yes, Stock 1=133615, Supplier 1=Digi-Key, Width=0.063inch
R7 R8 R9 R10 R11 R13 R14 R15 R16 R17 R18: library part RMCF1206FT100R, "RES 100 OHM 1% 1/4W 1206", Case/Package=1206, Case Code (Metric)=3216, Manufacturer="Stackpole Electronics", Max Operating Temperature=155°C, Max Power Dissipation=250mW, Min Operating Temperature=-55°C, Resistance=100R, Supplier Part Number 1=RMCF1206FT100RCT-ND, Temperature Coefficient=100ppm/°C, Tolerance=1%, Case Code (Imperial)=1206, ComponentLink1Description=https://www.seielect.com/catalog/SEI-RMCF_RMCP.pdf?src-supplier=Avnet, ComponentLink1URL=https://www.seielect.com/catalog/SEI-RMCF_RMCP.pdf?src-supplier=Avnet, ComponentLink2Description=http://www.seielect.com/Catalog/SEI-rmc.pdf?src-supplier=Future+Electronics, ComponentLink2URL=http://www.seielect.com/Catalog/SEI-rmc.pdf?src-supplier=Future+Electronics, ComponentLink3Description=https://www.seielect.com/Catalog/SEI-RMCF_RMCP.pdf?src-supplier=Digi-Key, ComponentLink3URL=https://www.seielect.com/Catalog/SEI-RMCF_RMCP.pdf?src-supplier=Digi-Key, ComponentLink4Description=http://components.arrow.com/part/dataview/44988349S7171862N1174?src-supplier=Arrow, ComponentLink4URL=http://components.arrow.com/part/dataview/44988349S7171862N1174?src-supplier=Arrow, ComponentLink5Description=https://www.verical.com/server-webapp/html/getDatasheet?partID=372149&src-supplier=Verical, ComponentLink5URL=https://www.verical.com/server-webapp/html/getDatasheet?partID=372149&src-supplier=Verical, Composition="Thick Film", Contact Plating=Tin, Depth=1.6mm, Features="Automotive AEC-Q200", Height=0.028inch, Lead Free="Lead Free", Length=0.126inch, Manufacturer Part Number=RMCF1206FT100R, Military Standard=Not, Mount="Surface Mount", Number of Terminations=2, Packaging="Tape and Reel", Power Rating=250mW, Pricing 1="1 = 0,10000, 10 = 0,03600, 100 = 0,01470, 1000 = 0,00659, 2500 = 0,00572 (USD)", Radiation Hardening=No, RoHS=Yes, Stock 1=384311, Supplier 1=Digi-Key, Width=0.063inch
R12: library part RNCP1206FTD1K00, "RES 1K OHM 1% 1/2W 1206", Case/Package=1206, Case Code (Metric)=3216, Manufacturer="Stackpole Electronics", Max Operating Temperature=155°C, Max Power Dissipation=500mW, Min Operating Temperature=-55°C, Resistance=1kR, Supplier Part Number 1=RNCP1206FTD1K00CT-ND, Temperature Coefficient=100ppm/°C, Tolerance=1%, Case Code (Imperial)=1206, ComponentLink1Description=https://www.seielect.com/catalog/SEI-Packaging.pdf?src-supplier=Digi-Key, ComponentLink1URL=https://www.seielect.com/catalog/SEI-Packaging.pdf?src-supplier=Digi-Key, ComponentLink2Description=http://www.seielect.com/Catalog/SEI-rncp.pdf?src-supplier=Avnet, ComponentLink2URL=http://www.seielect.com/Catalog/SEI-rncp.pdf?src-supplier=Avnet, Composition="Thin Film", Contact Plating=Tin, Features="Moisture Resistant", Height=0.024inch, Lead Free="Lead Free", Length=0.122inch, Manufacturer Part Number=RNCP1206FTD1K00, Mount="Surface Mount", Number of Terminations=2, Packaging="Tape and Reel", Pricing 1="1 = 0,10000, 10 = 0,09300, 100 = 0,03580, 1000 = 0,01575, 2500 = 0,01360 (USD)", Radiation Hardening=No, RoHS=Yes, Stock 1=424850, Supplier 1=Digi-Key, Width=0.059inch
SW1 SW2 SW3: library part PTS647SK70SMTR2LFS, "INWALL LENS COVER , WHITE , 6 (", Manufacturer="ITT C&K", Supplier Part Number 1=PTS647SK70SMTR2LFSCT-ND, Manufacturer Part Number=PTS647SK70SMTR2LFS, Pricing 1="1 = 0,14000, 10 = 0,14000, 25 = 0,13520, 50 = 0,13020, 100 = 0,12310, 250 = 0,11580, 500 = 0,11100 (USD)", RoHS=No, Stock 1=97905, Supplier 1=Digi-Key

## Via types
v1: diameter 0.45, hole 0.2, Top Layer to Bottom Layer, 79 vias
v2: diameter 0.7, hole 0.45, Top Layer to Bottom Layer, 12 vias

## Nets (pads, with @x,y where several pads share a name; then routed paths per layer and width w, separated by ;. In a path a pad name is that pad's centre, name@x,y a point inside that pad or via, vN(x,y) a via of type N, cw(c..) or ccw(c..) an arc to the next point about the centre after c; other vN are vias at no path point)
+3V3: BUZZ1.1 J4.2 J4.4 R2.2 R3.2 R4.2 R12.2
AMBERBTN: C2.2 J2.5 R3.1 SW2.3 SW2.4 | length 48.7
  Top Layer w0.254: R3.1 41.196,16.352 SW2.3 SW2.3@41.207,16.383 ; v2(42.1,35.4) 42.185,35.315 42.656,35.315 47.196,30.774 C2.2 47.196,23.117 41.813,17.733 41.813,16.756 41.58,16.756 SW2.3@41.207,16.383 ; SW2.4 SW2.3@41.207,16.383
  Bottom Layer w0.254: J2.5 42.1,50.635 v2(42.1,35.4)
AMBERLED: J3.10 LD2.1 | length 43.9
  Top Layer w0.254: v2(32.563,45.771) 32.563,46.627 33.485,47.549 43.188,47.549 44.142,46.595 45.653,46.595 46.026,46.222 LD2.1
  Bottom Layer w0.254: J3.10 7.396,50.549 13.181,44.764 28.716,44.764 29.722,45.771 v2(32.563,45.771)
DP1: J1.4 R10.2 | length 51.1
  Top Layer w0.254: R10.2 5.56,19.357 5.69,19.228 5.69,19.077 6.008,18.759 6.159,18.759 6.922,17.995 9.092,17.995 9.517,17.57 v2(13.3,17.57)
  Bottom Layer w0.254: v2(13.3,17.57) 16.205,14.664 16.205,10.404 20.099,6.51 43.02,6.51 J1.4
DP2: J1.3 R13.2 | length 46.7
  Top Layer w0.254: R13.2 5.509,16.489 6.809,15.189 v2(13.3,15.189)
  Bottom Layer w0.254: v2(13.3,15.189) 15.646,12.843 15.646,9.997 19.641,6.002 40.988,6.002 J1.3
DP3: J1.2 R15.2 | length 41.7
  Top Layer w0.254: R15.2 5.484,13.492 5.932,13.044 7.093,13.044 7.601,12.536 12.062,12.536 12.198,12.4 v2(13.3,12.4)
  Bottom Layer w0.254: v2(13.3,12.4) 15.015,10.685 15.015,9.91 19.464,5.461 38.989,5.461 J1.2
DP5: J1.1 R18.2 | length 37.7
  Top Layer w0.254: R18.2 5.484,9.14 6.444,10.1 v2(13.4,10.1)
  Bottom Layer w0.254: v2(13.4,10.1) 14.106,10.1 19.304,4.902 37.008,4.902 J1.1
DP7: J3.2 R17.1 | length 41.2
  Top Layer w0.254: R17.1 24.742,11.121 27.716,14.095 J3.2
DP8: J3.3 R16.1 | length 38.7
  Top Layer w0.254: R16.1 24.742,14.093 27.026,16.376 27.026,45.801 25.176,47.65 J3.3
DP9: J3.4 R14.1 | length 36.6
  Top Layer w0.254: J3.4 22.636,49.398 26.34,45.695 26.34,18.306 24.717,16.683 R14.1
DP10: J3.5 R11.1 | length 34.6
  Top Layer w0.254: J3.5 25.654,45.242 25.654,19.835 R11.1
GND: DP1.6 J3.7 J4.6 J4.7 Q1.2 R1.2 R5.2 R6.2 R7.1 R8.1 R9.1 SW1.1 SW1.2 SW2.1 SW2.2 SW3.1 SW3.2 | length 0.2
  Top Layer w0.254: SW1.1 32.385,19.583 SW1.1@32.512,19.71
  other v1: 5.432,1.37 9.432,1.37 13.432,1.37 33.432,1.37 37.432,1.37 45.432,1.37 53.432,1.37 3.432,5.37 11.432,5.37 55.432,5.37 1.432,9.37 21.432,9.37 25.432,9.37 29.432,9.37 31.432,13.37 39.432,13.37 47.432,13.37 55.432,13.37 37.432,17.37 45.432,17.37 49.432,17.37 53.432,17.37 3.432,21.37 19.432,21.37 23.432,21.37 35.432,21.37 39.432,21.37 47.432,21.37 55.432,21.37 1.432,25.37 5.432,25.37 9.432,25.37 13.432,25.37 21.432,25.37 29.432,25.37 37.432,25.37 45.432,25.37 3.432,29.37 7.432,29.37 11.432,29.37 19.432,29.37 23.432,29.37 31.432,29.37 39.432,29.37 51.432,29.37 1.432,33.37 21.432,33.37 29.432,33.37 33.432,33.37 37.432,33.37 41.432,33.37 49.432,33.37 3.432,37.37 23.432,37.37 35.432,37.37 43.432,37.37 47.432,37.37 51.432,37.37 1.432,41.37 21.432,41.37 41.432,41.37 53.432,41.37 3.432,45.37 11.432,45.37 15.432,45.37 19.432,45.37 23.432,45.37 35.432,45.37 47.432,45.37 51.432,45.37 1.432,49.37 5.432,49.37 9.432,49.37 13.432,49.37 17.432,49.37 37.432,49.37 41.432,49.37 49.432,49.37 53.432,49.37
NetBUZZ1_2: BUZZ1.2 Q1.3 R12.1 | length 14.6
  Top Layer w0.254: R12.1 7.62,41.554 Q1.3 17.45,41.554 BUZZ1.2
NetC1_1: C1.1 R7.2 | length 5.3
  Top Layer w0.254: R7.2 34.953,29.724 C1.1
NetC2_1: C2.1 R8.2 | length 5.7
  Top Layer w0.254: R8.2 44.396,25.293 C2.1 C2.1@44.072,29.8
NetC3_1: C3.1 R9.2 | length 5.2
  Top Layer w0.254: R9.2 52.555,29.978 C3.1
NetDP1_1: DP1.1 R10.1 | length 3.5
  Top Layer w0.254: R10.1 9.855,19.482 9.906,19.533 11.151,19.533 DP1.1
NetDP1_2: DP1.2 R13.1 | length 3.4
  Top Layer w0.254: R13.1 8.639,16.485 DP1.2
NetDP1_3: DP1.3 R15.1 | length 3.4
  Top Layer w0.254: R15.1 8.512,13.945 DP1.3
NetDP1_5: DP1.5 R18.1 | length 3.3
  Top Layer w0.254: R18.1 DP1.5
NetDP1_7: DP1.7 R17.2 | length 2.9
  Top Layer w0.254: DP1.7 19.795,11.405 20.243,10.957 21.892,10.957 R17.2
NetDP1_8: DP1.8 R16.2 | length 2.7
  Top Layer w0.254: DP1.8 19.406,13.818 R16.2
NetDP1_9: DP1.9 R14.2 | length 2.6
  Top Layer w0.254: DP1.9 21.791,16.485 R14.2
NetDP1_10: DP1.10 R11.2 | length 2.8
  Top Layer w0.254: DP1.10@19.202,19.101 DP1.10 21.791,19.025 R11.2
NetLD1_2: LD1.2 R1.1 | length 5.2
  Top Layer w0.254: LD1.2 36.832,40.576 R1.1
NetLD2_2: LD2.2 R5.1 | length 5.2
  Top Layer w0.254: LD2.2 42.976,40.703 R5.1
NetLD3_2: LD3.2 R6.1 | length 5.2
  Top Layer w0.254: LD3.2 49.402,40.652 R6.1
PWM: J2.8 Q1.1 | length 33.1
  Top Layer w0.254: Q1.1 5.545,42.504 11.58,48.539 v2(16.027,48.539) ; v2(33.249,48.692) 33.401,48.692 34.228,49.519 34.228,50.713 J2.8
  Bottom Layer w0.254: v2(16.027,48.539) 16.027,48.543 16.176,48.692 v2(33.249,48.692)
REDBTN: C1.2 J2.6 R2.1 SW1.3 SW1.4 | length 46.6
  Top Layer w0.254: R2.1 32.636,16.072 SW1.3 SW1.3@32.6,16.383 ; SW1.4 SW1.3@32.6,16.383 ; v2(39,35.35) 39,30.971 C1.2 38.154,22.888 32.973,17.708 32.973,16.756 SW1.3@32.6,16.383
  Bottom Layer w0.254: v2(39,35.35) 39,35.471 39.395,35.866 J2.6
REDLED: J3.9 LD1.1 | length 32.5
  Top Layer w0.254: v2(33.63,46.66) 35.858,46.66 36.174,46.976 38.825,46.976 39.333,46.468 39.509,46.468 39.802,46.175 39.802,45.999 39.882,45.919 LD1.1
  Bottom Layer w0.254: J3.9 14.076,46.66 v2(33.63,46.66)
YELLOWBTN: C3.2 J2.4 R4.1 SW3.3 SW3.4 | length 53.9
  Top Layer w0.254: v2(44.45,35.35) 50.276,35.35 C3.2 55.502,22.558 50.88,17.937 50.88,16.756 SW3.3@50.507,16.383 ; R4.1 50.605,12.46 50.605,16.01 SW3.3 SW3.3@50.507,16.383 ; SW3.4 SW3.3@50.507,16.383
  Bottom Layer w0.254: v2(44.45,35.35) 44.462,35.362 44.462,50.787 J2.4
YELLOWLED: J3.6 LD3.1 | length 37.2
  Top Layer w0.254: v2(34.9,48.819) 34.954,48.764 48.348,48.764 50.568,46.544 52.079,46.544 52.396,46.227 52.396,46.175 52.452,46.12 LD3.1
  Bottom Layer w0.254: J3.6 18.933,49.423 34.169,49.423 34.773,48.819 v2(34.9,48.819)
pads on no net: DP1.4 J1.5 J1.6 J2.1 J2.2 J2.3 J2.7 J3.1 J3.8 J4.1 J4.3 J4.5 J4.8

## Polygon pours and split planes (outlines as drawn)
GND on Top Layer "Top Layer-GND" (solid, pour order 14): 0,53.351 0.04,53.391 53.264,53.391 54.635,52.019 54.635,40.361 57.125,37.871 57.125,5.055 54.559,2.489 54.453,2.489 54.635,2.307 54.635,0 0,0
+3V3 on Top Layer "Top Layer-+3V3" (solid, pour order 2): 5.682,33.51 5.682,37.01 20.382,37.01 20.382,33.31 17.582,33.31 17.582,7.31 25.382,7.31 25.403,7.331 28.611,7.331 28.632,7.351 31.84,7.351 31.823,7.368 31.823,9.002 31.807,9.018 31.807,10.652 31.836,10.681 33.294,10.681 33.323,10.71 34.782,10.71 34.668,10.824 34.668,13.788 34.711,13.832 36.659,13.832 36.718,13.773 36.718,10.652 36.776,10.71 43.182,10.71 43.239,10.767 43.239,13.832 45.082,13.832 45.182,13.732 45.182,10.71 52.637,10.71 52.682,10.754 52.682,13.41 54.565,13.41 54.565,9.81 54.465,9.71 52.382,9.71 52.382,5.61 25.482,5.61 25.382,5.51 25.382,0.61 22.962,0.61 22.962,3.907 20.282,3.907 20.282,1.016 17.782,1.016 17.782,4.89 14.582,4.89 14.582,33.51
GND on Bottom Layer "Bottom Layer-GND" (solid, pour order 10): 0,53.4 0.035,53.365 53.061,53.365 54.61,51.816 54.64,51.816 54.635,51.811 54.635,40.361 57.125,37.871 57.125,5.055 54.64,2.57 54.64,2.54 54.635,2.535 54.635,0 0,0

## Other copper
Top Layer:
  region: 0,53.4
  region net +3V3: 25.6,3.422

## Silkscreen, mask and mechanical layers (free items; w line width, h text height)
Top Overlay:
  circle w0.013: c30.256,50.8 r0.254
  circle w0.013: c27.716,50.8 r0.254
  circle w0.013: c25.176,50.8 r0.254
  circle w0.013: c22.636,50.8 r0.254
  circle w0.013: c20.096,50.8 r0.254
  circle w0.013: c17.556,50.8 r0.254
  circle w0.013: c15.016,50.8 r0.254
  circle w0.013: c12.476,50.8 r0.254
  circle w0.013: c9.936,50.8 r0.254
  circle w0.013: c7.396,50.8 r0.254
Bottom Overlay:
  drawing of 13 lines, arcs and shapes, not listed
  text "A" at 52.832,51.181 h50 r90
Mechanical 1:
  circle w0.013: c7.396,50.8 r0.254
  circle w0.013: c9.936,50.8 r0.254
  circle w0.013: c12.476,50.8 r0.254
  circle w0.013: c15.016,50.8 r0.254
  circle w0.013: c17.556,50.8 r0.254
  circle w0.013: c20.096,50.8 r0.254
  circle w0.013: c22.636,50.8 r0.254
  circle w0.013: c25.176,50.8 r0.254
  circle w0.013: c27.716,50.8 r0.254
  circle w0.013: c30.256,50.8 r0.254
  circle w0.013: c34.29,50.8 r0.254
  circle w0.013: c36.83,50.8 r0.254
  circle w0.013: c39.37,50.8 r0.254
  circle w0.013: c41.91,50.8 r0.254
  circle w0.013: c44.45,50.8 r0.254
  circle w0.013: c46.99,50.8 r0.254
  circle w0.013: c49.53,50.8 r0.254
  circle w0.013: c52.07,50.8 r0.254
  circle w0.013: c16.51,2.54 r0.254
  circle w0.013: c19.05,2.54 r0.254
  circle w0.013: c21.59,2.54 r0.254
  circle w0.013: c24.13,2.54 r0.254
  circle w0.013: c26.67,2.54 r0.254
  circle w0.013: c29.21,2.54 r0.254
  circle w0.013: c31.75,2.54 r0.254
  circle w0.013: c34.29,2.54 r0.254
  circle w0.013: c39.37,2.54 r0.254
  circle w0.013: c41.91,2.54 r0.254
  circle w0.013: c44.45,2.54 r0.254
  circle w0.013: c46.99,2.54 r0.254
  circle w0.013: c49.53,2.54 r0.254
  circle w0.013: c52.07,2.54 r0.254
  circle w0.013: c2.54,2.54 r1.587
  circle w0.013: c54.64,7.62 r1.587
  circle w0.013: c54.64,35.56 r1.587
  circle w0.013: c3.84,50.8 r1.587
  lines w0.013: 0,0 0,53.375 53.079,53.375 54.64,51.814 54.64,40.386 57.12,37.846 57.12,5.08 54.64,2.54 54.64,0 0,0

## Text inside footprints (layer, text, board x,y; h text height)
BUZZ1: Top Overlay "PIEZO" at 16.439,35.713 h1.88 r90